# Altium PCB Sampler_4HP.PCBDOC (part 6 of 6)
Units mm, origin at the board's own origin, x right, y up, seen from the top; angles counter-clockwise.
Board outline 159.99 x 100 mm, 4 copper layers (Top, GP1(GND), L3, Bot), stack 1.648 mm thick; 546 components, 321 nets, 1657 pads, 795 vias.
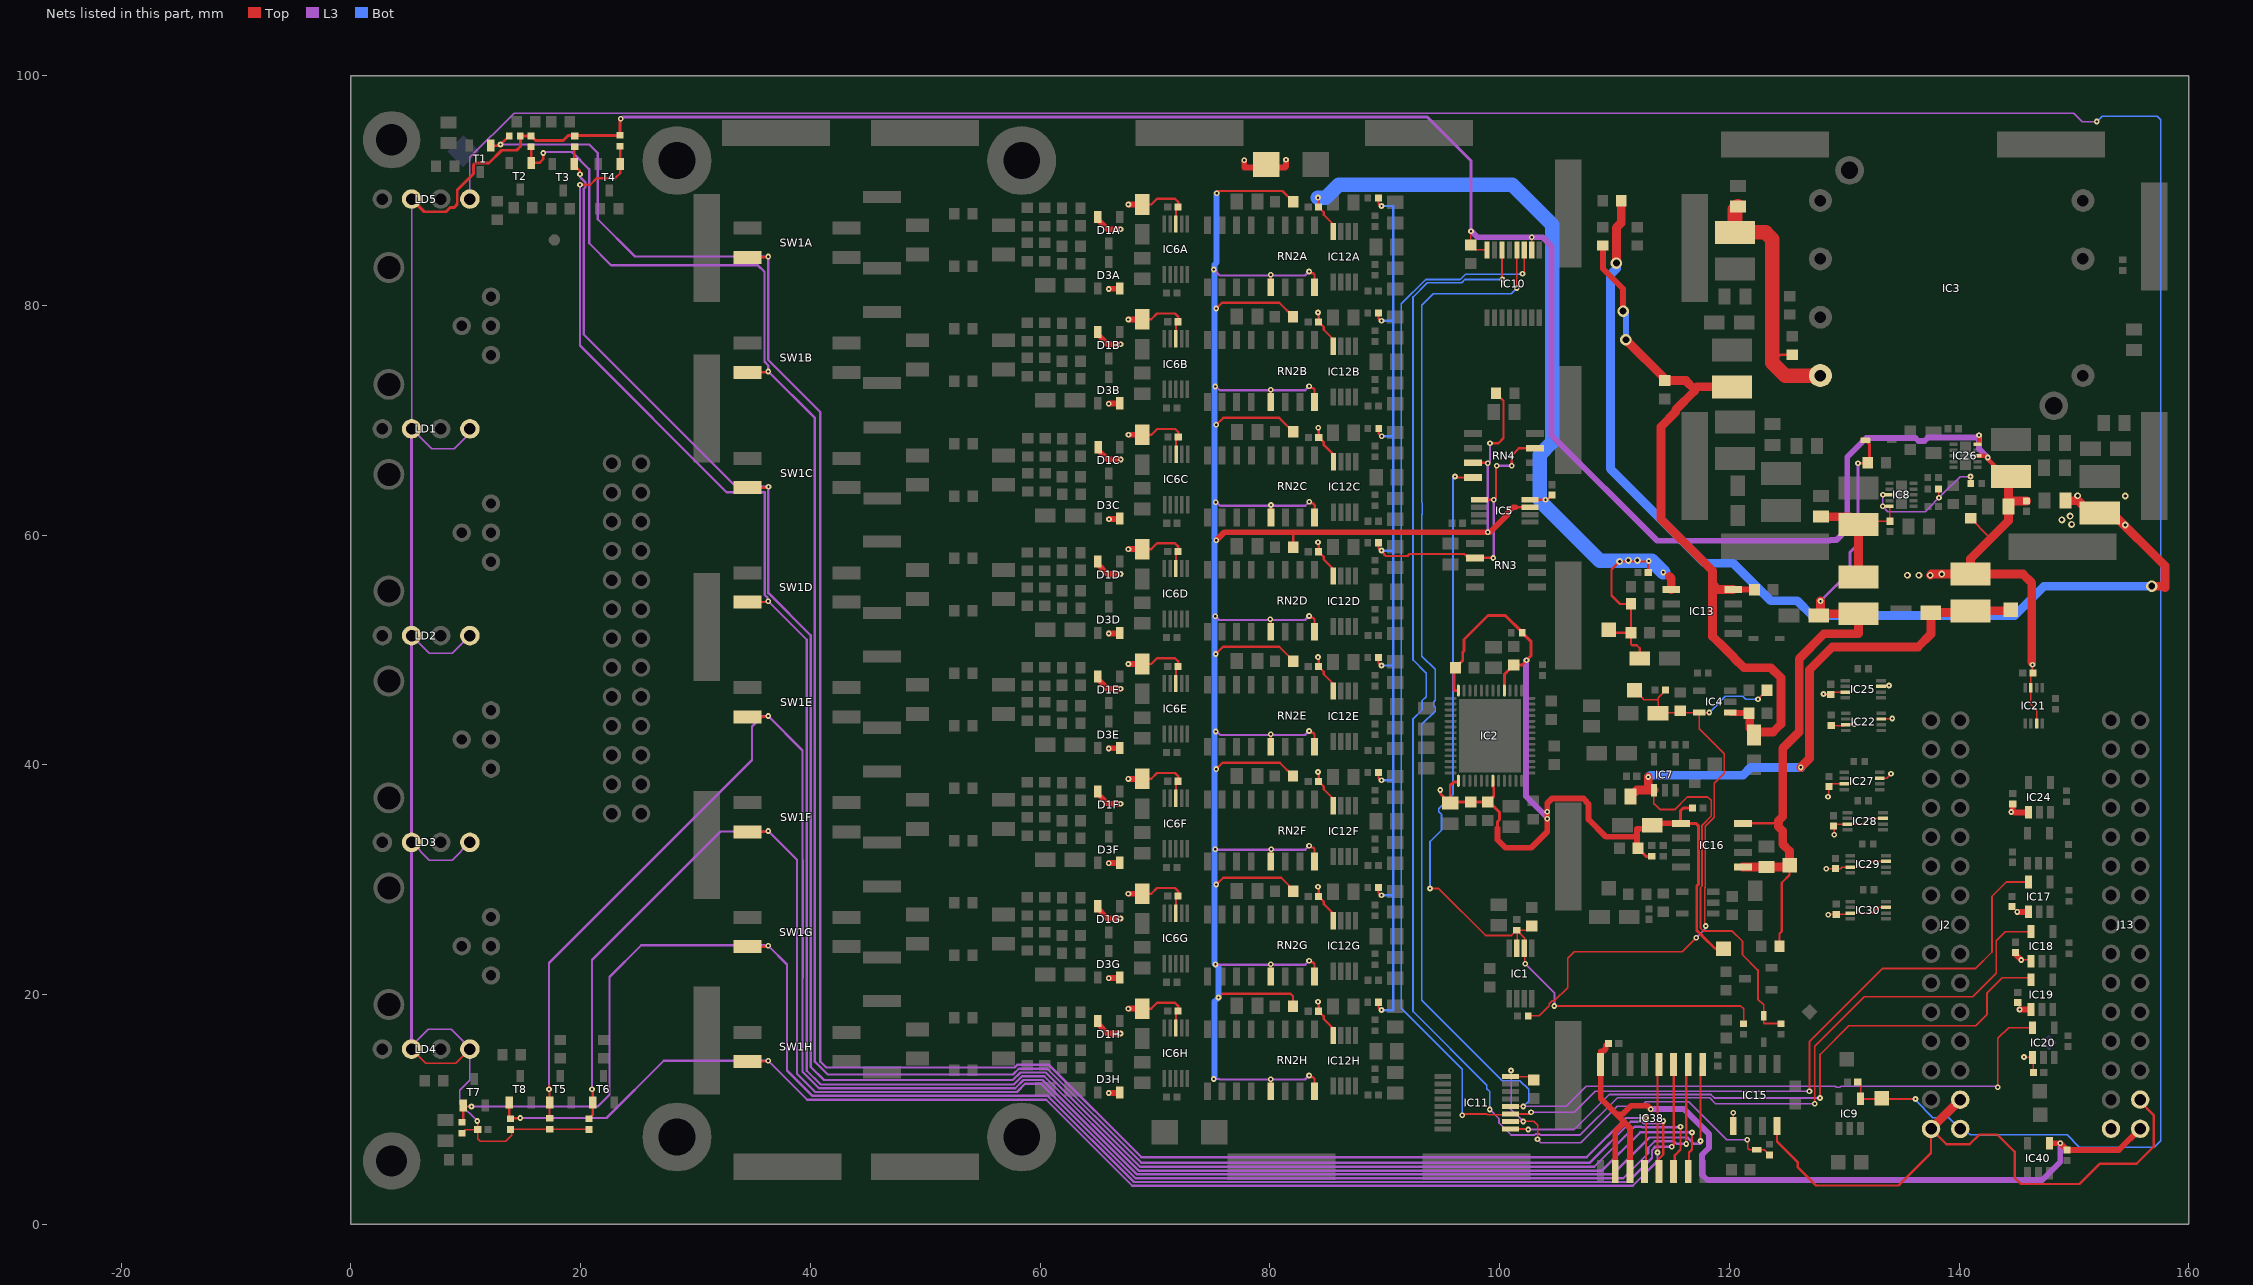
[diagram p7: the nets of this part, all layers, seen from the top]

## Via types
v1: diameter 0.5, hole 0.2, Top to Bot, tented both sides, 760 vias
v2: diameter 0.6, hole 0.3, Top to Bot, tented both sides, 15 vias
v3: diameter 1, hole 0.6, Top to Bot, tented both sides, 8 vias
v4: diameter 0.5, hole 0.2, Top to Bot, 6 vias
v5: diameter 0.6, hole 0.3, Top to Bot, 6 vias

## Nets (pads, with @x,y where several pads share a name; then routed paths per layer and width w, separated by ;. In a path a pad name is that pad's centre, name@x,y a point inside that pad or via, vN(x,y) a via of type N, cw(c..) or ccw(c..) an arc to the next point about the centre after c; other vN are vias at no path point) (continued)
P3V3: C21.2 C24.2 C31.2 C33.2 C37.2 C38.2 C57.2 C94.2 C120.2 C121.2 C154.2 C156.2 C157.2 C158.2 C159.2 C160.2 C161.2 D5.1 IC10.10 IC10.16 IC11.10 IC11.16 IC15.5 IC17.1 IC18.1 IC19.1 IC20.1 IC21.3 IC21.7 IC22.3 IC22.7 IC24.1 IC25.3 IC25.7 IC26.8 IC26.10 IC27.3 IC27.7 IC28.3 IC28.7 IC29.3 IC29.7 IC30.3 IC30.7 L1.1 L5.2 LD1.2 LD1.4 LD2.2 LD2.4 LD3.2 LD3.4 LD4.2 LD4.4 LD5.2 R5.1 R12.1 R13.1 R20.2 R49.1 R51.1 R68.1 R69.1 R70.1 R71.1 | length 423.4
  Top w0.127: LD4.2@5.29,15.25 6.54,14 9.12,14 LD4.4@10.37,15.25 ; R70.1@9.75,8.03 9.97,8.25 C37.2@11.05,8.25 ; v1(11,9) 11.05,8.95 C37.2@11.05,8.25 ; R69.1@20.75,8.28 14,8.28 14,7.75 13.5,7.25 11.25,7.25 11.05,7.45 C37.2@11.05,8.25 ; v1(97.513,86.456) C94.2@97.513,85.256 97.952,84.817 IC10.16@98.91,84.817 ; IC11.10@100.955,8.957 v1(102.057,8.957) 102.993,8.957 103.325,8.625 103.325,7.425 v1(103.3,7.4) ; v1(101,13.382) 101,12.902 IC11.16@100.955,12.857 102.693,12.857 C57.2@103,12.55 ; IC10.10@102.81,84.817 v1(102.81,85.919) ; v1(121.575,7.35) 121.615,7.31 121.615,6.635 121.75,6.5 D5.1@122.39,6.5 123.03,6.5 R51.1@123.5,6.03 ; v1(128.196,46.159) 128.244,46.111 C33.2@128.837,46.111 129.051,46.325 IC25.3@130.102,46.325 ; v1(128.436,30.961) 128.439,30.958 C21.2@129.232,30.958 129.684,30.958 129.811,31.086 IC29.3@130.536,31.086 131.964,31.086 132.468,31.59 133.632,31.59 IC29.7@133.636,31.586 ; v1(128.586,37.226) 128.677,37.316 C38.2@128.677,38.097 128.915,38.336 IC27.3@130.006,38.336 ; v1(128.611,26.936) 128.644,26.969 C31.2@129.308,26.969 130.419,26.969 IC30.3@130.536,27.086 132.486,27.086 132.986,27.586 IC30.7@133.636,27.586 ; C160.2@128.873,43.42 130.068,43.42 IC22.3@130.135,43.487 130.848,43.487 v1(130.885,43.525) ; v1(129.142,33.911) 129.142,34.61 C24.2@129.084,34.669 129.251,34.836 IC28.3@130.286,34.836 131.638,34.836 132.142,35.34 133.382,35.34 IC28.7@133.386,35.336 ; IC27.7@133.106,38.836 133.697,38.836 v1(134.086,39.226) ; IC25.7@133.202,46.825 133.818,46.825 v1(133.902,46.909) ; IC22.7@133.235,43.987 134.151,43.987 v1(134.189,44.025) ; R20.2@141,61.45 142.506,59.944 143,59.944 ; C157.2@145.114,19.293 145.275,19.453 v1(145.275,18.7) ; v1(145.421,23.009) 146.146,23.009 IC18.1@146.271,22.884 IC18.1@146.227,22.839 ; v1(145.664,14.559) 146.359,14.559 IC20.1@146.394,14.524 146.477,14.442 C156.2@146.477,13.225 ; v1(146.389,48.7) 146.389,48.062 C161.2@146.443,48.007 146.257,47.822 IC21.3@146.257,46.704 146.257,45.256 146.757,44.756 IC21.7@146.757,43.604
  Top w0.152: IC15.5@120.345,8.55 120.35,8.555 v1(120.35,9.7)
  Top w0.254: LD5.2@5.29,89.25 6.394,88.146 8.287,88.146 8.641,88.5 8.973,88.5 9.266,88.793 9.266,90.044 10.671,91.449 10.671,92.23 10.82,92.379 12.032,92.379 13.149,93.496 14.446,93.496 14.775,93.825 14.775,94.695 R5.1@14.745,94.725 ; R5.1@14.745,94.745 R12.1@15.7,94.745 16.096,94.349 18.499,94.349 18.945,94.795 R49.1@23.45,94.795 23.45,96.2 v1(23.5,96.25)
  Top w0.381: IC26.8@141.602,66.895 142.245,66.895 ; IC26.10@141.602,67.895 141.737,68.031 v1(141.737,68.695) ; v1@142.445,66.695 144.025,65.115 L5.2@144.525,65.115
  Top w0.508: v1(144.55,35.9) v1@144.675,36.025 ; C154.2@144.675,36.6 v1@144.675,36.025 ; C158.2@144.925,23.65 144.925,23.505 v1(145.421,23.009) ; v1(145.08,27.195) IC17.1@146.035,27.195 ; v1(145.275,18.7) 145.278,18.697 IC19.1@146.26,18.697 ; IC24.1@146.053,35.86 144.84,35.86 v1@144.675,36.025
  Top w0.762: v2(137.5,56.5) 137.6,56.6 v2(138.5,56.6) L1.1@141,56.6 ; L5.2@144.525,65.115 144.307,64.897 C121.2@144.307,62.498 ; C120.2@145.871,62.974 144.782,62.974 C121.2@144.307,62.498 ; 146.325,48.95 146.325,55.85 145.575,56.6 L1.1@141,56.6 ; L1.1@141,56.6 141,57.944 143,59.944 144.307,61.251 C121.2@144.307,62.498
  L3 w0.127: LD4.2@5.29,15.25 5.29,15.54 6.75,17 8.75,17 10.37,15.38 LD4.4@10.37,15.25 10.37,12.52 9.5,11.65 9.5,10.5 v1(11,9) ; LD3.2@5.29,33.25 6.834,31.706 8.826,31.706 LD3.4@10.37,33.25 ; LD2.2@5.29,51.25 6.834,49.706 8.826,49.706 LD2.4@10.37,51.25 ; LD5.2@5.29,89.25 LD1.2@5.29,69.25 7.04,67.5 9,67.5 10.37,68.87 LD1.4@10.37,69.25 ; v1(101,13.382) 101,10.104 100.955,10.059 v1(102.057,8.957) ; v1(103.3,7.4) 103.606,7.094 107.079,7.094 110.257,10.273 112.344,10.273 112.722,10.65 116.475,10.65 119.775,7.35 v1(121.575,7.35)
  L3 w0.254: LD4.2@5.29,15.54 LD3.2@5.29,33.25 LD2.2@5.29,51.25 LD1.2@5.29,69.25 ; v1(23.5,96.25) 23.643,96.393 93.707,96.393 97.513,92.587 v1(97.513,86.456)
  L3 w0.508: v1@97.528,86.472 98.081,85.919 v1(102.81,85.919) 103.756,85.919 104.525,85.15 104.525,68.7 113.725,59.5 128.758,59.5 128.814,59.556 129.306,59.556 130.275,60.525 130.275,66.8 131.92,68.445 136.22,68.445 136.476,68.189 136.999,68.189 137.311,68.501 141.545,68.501 141.737,68.309 ; v1(141.737,68.695) 141.737,68.309 ; v1(142.5,66.75) 141.737,67.512 141.737,68.309
  other v2: 135.5,56.5 136.5,56.5
P3V3_MP0: C153.2 C162.2 IC38.2 IC38.3 IC38.16 IC40.4 J13.30 | length 73
  Top w0.508: C153.2@109.45,15.75 109.241,15.541 109.241,15.282 109.018,15.059 108.805,15.059 IC38.16@108.805,13.9 108.805,10.945 110.175,9.575 ; IC38.2@110.075,4.6 110.075,8.075 110.875,8.875 ; IC38.3@111.345,4.6 111.345,8.405 110.875,8.875 ; v1(113.175,10.025) 112.875,10.325 111.45,10.325 110.7,9.575 110.175,9.575 ; IC40.4@147.864,7.059 v1(148.814,7.059) C162.2@149.414,6.459 153.914,6.459 J13.30@155.77,8.315 ; 110.175,9.575 110.875,8.875
  L3 w0.508: v1(113.175,10.025) 116.075,10.025 118.225,7.875 118.225,6.65 117.625,6.05 117.625,4.325 118.1,3.85 147.25,3.85 148.814,5.414 v1(148.814,7.059)
P3V3_MP1: C43.2 IC9.4 J2.30 LD5.4 TP5.1 | length 271.6
  Top w0.152: C43.2@131.186,12.386 131.436,12.136 IC9.4@131.436,10.936 131.456,10.916 v1(136.218,10.916)
  L3 w0.127: LD5.4@10.37,89.25 10.37,92.87 14.21,96.71 150,96.71 150.71,96 v1(152,96)
  Bot w0.127: v1(136.218,10.916) 136.218,10.794 137.715,9.296 139.116,9.296 J2.30@140.107,8.306 140.445,7.967 140.775,7.967 140.967,7.775 149.4,7.775 150.475,6.7 156.988,6.7 157.55,7.262 157.55,96.163 157.263,96.45 152.45,96.45 v1(152,96)
P3V3A: C50.1 C53.2 D2.1 IC7.1 L1.2 R23.2 TP11.1 | length 78.7
  Top w0.152: IC7.1@113.451,37.799 113.425,37.774 113.425,36.575 113.525,36.575 114,36.1 115.251,36.1 116.351,37.2 118.125,37.2 118.425,36.9 118.425,35.54 117.633,34.748 117.633,29.455 117.497,29.318 117.497,25.787 117.762,25.522 120.253,25.522 121.15,24.625 121.15,23.475 122.496,22.129 122.496,19.604 123,19.1 D2.1@123,18.14 123,17.5 123.03,17.47 R23.2@124.5,17.47
  Top w0.762: C53.2@111.4,37.25 111.949,37.799 112.925,37.799 ; v1(112.951,38.937) 112.951,37.825 112.925,37.799 ; IC7.1@113.451,37.799 112.925,37.799 ; v1(126.225,39.775) 126.975,40.525 126.975,48.25 128.975,50.25 136.425,50.25 137.55,51.375 C50.1@137.55,53.25 140.85,53.25 L1.2@141,53.4 144.4,53.4 TP11.1@144.5,53.5
  Bot w0.762: v1(112.951,38.937) 113.113,39.1 121.197,39.1 121.872,39.775 v1(126.225,39.775) v1@126.25,39.775
P5V0A: C3.2 C4.2 C5.2 C6.2 C54.2 C62.2 C114.2 C115.1 IC2.15 IC2.21 IC2.44 IC2.52 IC16.1 R10.2 R25.2 TP13.1 | length 87.8
  Top w0.254: v1(94.85,37.8) 94.85,37.485 95.658,36.677 C6.2@95.711,36.677 ; C5.2@96.021,48.45 96.021,46.529 96.09,46.46 IC2.52@96.42,46.46 ; C5.2@96.175,48.45 96.8,49.075 96.8,49.8 96.9,49.9 96.9,50.9 99,53 100.5,53 101.97,51.53 R10.2@101.97,51.5 102.754,50.716 102.754,49.504 v1(102.352,49.102) 101.95,48.7 C4.2@101.25,48.7 100.45,47.9 100.45,46.49 IC2.44@100.42,46.46 ; IC2.15@96.42,38.61 96.31,38.5 96,38.5 95.711,38.211 C6.2@95.711,36.677 ; IC2.21@99.42,38.61 99.42,38.068 99.5,37.987 99.5,37.267 C3.2@98.988,36.755 ; 99.825,34.478 99.825,35.05 100,35.225 100,35.875 99.12,36.755 C3.2@98.988,36.755 ; C114.2@112.05,32.75 112.77,32.03 R25.2@113.25,32.03 ; C62.2@116.8,36.25 116,36.25 115.75,36 115.75,34.955 IC16.1@115.8,34.905 117.095,34.905 117.303,34.697 117.303,29.592 117.167,29.455 117.167,25.583 117.296,25.454 117.334,25.454 117.629,25.159 117.629,25.121 118.75,24 TP13.1@119.5,24 TP13.1@119.715,23.785 ; C6.2@95.711,36.677 95.789,36.755 C54.2@97.489,36.755 C3.2@98.988,36.755
  Top w0.508: 99.825,34.478 99.825,33.47 100.52,32.775 102.767,32.775 104.153,34.161 v1(104.153,35.907) 104.153,36.653 104.581,37.081 107.308,37.081 107.531,36.858 107.531,36.794 107.75,36.575 107.75,35.25 109.256,33.744 111.758,33.744 111.981,33.967 ; C114.2@112.05,32.75 111.981,32.819 111.981,33.967 ; IC16.1@115.8,34.905 113.455,34.905 C115.1@113.3,34.75 112.988,34.437 111.981,34.437 111.981,33.967
  L3 w0.508: v1(102.352,49.102) 102.3,49.05 102.3,37.26 104.153,35.407 v1@104.153,35.25
  other v1: 104.163,35.299
P6V0: C58.2 C59.2 IC8.8 IC8.10 L3.2 L4.1 R24.2 R57.2 | length 28.9
  Top w0.127: L4.1@131.25,56.35 L3.2@131.25,60.9 131.55,61.2 C58.2@133.95,61.2 ; v1(133.35,62.5) IC8.10@133.95,62.5 C58.2@133.95,61.2 ; C58.2@134,61.2 C58.2@133.95,61.2 ; R24.2@138.22,64 138.22,63.28 v1(138.25,63.25) ; v1(141,65.095) 141.03,65.065 R57.2@141.03,64.5
  Top w0.762: C59.2@128,61.6 130.55,61.6 L3.2@131.25,60.9 L4.1@131.25,56.35
  L3 w0.127: v1(133.377,63.5) 133.377,62.527 v1(133.35,62.5) 133.8,62.05 137.075,62.05 138.6,63.575 138.6,63.6 140.095,65.095 v1(141,65.095)
P6V0A: C60.1 C61.2 D4.1 IC16.5 IC16.8 L4.2 R18.2 R56.2 TP12.1 | length 62.6
  Top w0.203: IC16.8@121.2,34.905 124.066,34.905 ; 124.283,34.622 124.566,34.905 124.283,34.905 ; R18.2@124.375,24.2 124.375,25.3 124.575,25.5 124.575,29.725 125.25,30.4 TP12.1@125.25,31.25
  Top w0.254: v1(131.2,66.25) 132.2,66.25 132.2,67.91 D4.1@131.86,68.25
  Top w0.762: IC16.5@121.2,31.095 125.095,31.095 TP12.1@125.25,31.25 125.25,32.5 124.661,33.089 124.661,34.244 124.283,34.622 ; 124.283,34.905 124.283,35.122 124.661,35.5 124.661,41.44 126.086,42.865 126.086,49.236 128.25,51.4 131.25,51.4 L4.2@131.25,53.15 127.95,53.15 v1(127.95,54.25)
  L3 w0.254: v1(127.95,54.25) 130.5,56.8 130.5,58.5 131.2,59.2 v1(131.2,66.25)
P12V0: C48.2 IC15.8 J2.28 J2.29 J13.28 J13.29 L6.1 R74.2 | length 144.1
  Top w0.203: IC15.8@124.155,8.55 124.155,7.195 125.975,5.375 125.975,4.95 127.55,3.375 134.733,3.375 137.567,6.208 J2.29@137.567,8.306 138.897,6.975 140.925,6.975 141.774,7.824 143.324,7.824 144.839,6.309 144.839,4.059 145.389,3.509 150.489,3.509 152.264,5.284 155.464,5.284 156.939,6.759 156.939,9.509 155.77,10.678 J13.28@155.77,10.855
  Top w0.762: v3(110.175,83.675) 110.175,86.75 110.6,87.175 R74.2@110.6,89.1 ; J2.29@137.567,8.306 J2.28@140.107,10.846 ; C48.2@149.26,62.992 150.383,62.992 151.475,61.9 153.35,61.9 157.925,57.325 157.925,55.425 157.8,55.55 v3(156.775,55.55)
  Bot w0.762: v3(110.175,83.675) 110.175,83.175 109.65,82.65 109.65,65.775 117.875,57.55 120.35,57.55 123.625,54.275 125.925,54.275 127.2,53 144.85,53 147.4,55.55 v3(156.775,55.55)
  other v2: 154.475,60.875 149.8,60.925 148.95,61.325 149.675,61.65 154.475,63.4 150.325,63.425
P12V0A: C10A.1 C10B.1 C10C.1 C10D.1 C10E.1 C10F.1 C10G.1 C10H.1 C20.2 C30.2 C35A.2 C35B.2 C35C.2 C35D.2 C35E.2 C35F.2 C35G.2 C35H.2 C51.1 C65.2 C70A.2 C70B.2 C70C.2 C70D.2 C70E.2 C70F.2 C70G.2 C70H.2 D1A.2 D1B.2 D1C.2 D1D.2 D1E.2 D1F.2 D1G.2 D1H.2 D3A.2 D3B.2 D3C.2 D3D.2 D3E.2 D3F.2 D3G.2 D3H.2 D8.1 IC5.8 IC6A.8 IC6B.8 IC6C.8 IC6D.8 IC6E.8 IC6F.8 IC6G.8 IC6H.8 IC12A.8 IC12B.8 IC12C.8 IC12D.8 IC12E.8 IC12F.8 IC12G.8 IC12H.8 IC13.1 R142.2 TP7.1 | length 193.6
  Top w0.203: C10H.1@68.885,18.778 69.685,18.778 70.188,19.281 71.755,19.281 72.021,19.015 C35H.2@72.021,18.568 71.831,18.378 IC6H.8@71.831,17.087 ; C10G.1@68.885,28.778 69.685,28.778 70.188,29.281 71.755,29.281 72.021,29.015 C35G.2@72.021,28.568 71.831,28.378 IC6G.8@71.831,27.087 ; C10F.1@68.885,38.778 69.685,38.778 70.188,39.281 71.755,39.281 72.021,39.015 C35F.2@72.021,38.568 71.831,38.378 IC6F.8@71.831,37.087 ; C10E.1@68.885,48.778 69.685,48.778 70.188,49.281 71.755,49.281 72.021,49.015 C35E.2@72.021,48.568 71.831,48.378 IC6E.8@71.831,47.087 ; C10D.1@68.885,58.778 69.685,58.778 70.188,59.281 71.755,59.281 72.021,59.015 C35D.2@72.021,58.568 71.831,58.378 IC6D.8@71.831,57.087 ; C10B.1@68.885,78.778 69.685,78.778 70.188,79.281 71.755,79.281 72.021,79.015 C35B.2@72.021,78.568 71.831,78.378 IC6B.8@71.831,77.087 ; C10A.1@68.885,88.778 69.685,88.778 70.188,89.281 71.755,89.281 72.021,89.015 C35A.2@72.021,88.568 71.831,88.378 IC6A.8@71.831,87.087 ; C10C.1@68.897,68.734 69.697,68.734 70.201,69.237 71.768,69.237 72.034,68.971 C35C.2@72.034,68.524 71.844,68.334 IC6C.8@71.844,67.043 ; v1(84.2,19.375) 84.25,19.325 C70H.2@84.25,18.55 84.7,18.1 84.7,17.875 85.525,17.05 IC12H.8@85.525,16.429 ; v1(84.2,29.375) 84.25,29.325 C70G.2@84.25,28.55 84.7,28.1 84.7,27.875 85.525,27.05 IC12G.8@85.525,26.429 ; v1(84.2,39.375) 84.25,39.325 C70F.2@84.25,38.55 84.7,38.1 84.7,37.875 85.525,37.05 IC12F.8@85.525,36.429 ; v1(84.2,49.375) 84.25,49.325 C70E.2@84.25,48.55 84.7,48.1 84.7,47.875 85.525,47.05 IC12E.8@85.525,46.429 ; v1(84.2,59.375) 84.25,59.325 C70D.2@84.25,58.55 84.7,58.1 84.7,57.875 85.525,57.05 IC12D.8@85.525,56.429 ; v1(84.2,79.375) 84.25,79.325 C70B.2@84.25,78.55 84.7,78.1 84.7,77.875 85.525,77.05 IC12B.8@85.525,76.429 ; v1(84.2,89.375) 84.25,89.325 C70A.2@84.25,88.55 84.7,88.1 84.7,87.875 85.525,87.05 IC12A.8@85.525,86.429 ; v1(84.213,69.331) 84.263,69.281 C70C.2@84.263,68.506 84.713,68.056 84.713,67.831 85.538,67.006 IC12C.8@85.538,66.385 ; IC5.8@102.65,63.075 v1(104,63.075) 104.175,63.075 C20.2@104.575,63.475 ; TP7.1@109.5,51.75 109.75,51.5 C65.2@111.45,51.5 ; C51.1@112.2,49.25 112.2,50.15 111.95,50.4 111.55,50.4 111.45,50.5 C65.2@111.45,51.5 ; C30.2@112.95,56.75 112.95,57.7 v2(110.45,57.7) 109.75,57 109.75,54.75 110.5,54 R142.2@111.45,54 C65.2@111.45,51.5 ; v1(114.25,56.75) 114.687,56.312
  Top w0.508: D1H.2@65.039,17.688 65.039,17.458 65.883,16.614 v1(67.013,16.614) ; D1G.2@65.039,27.688 65.039,27.458 65.883,26.614 v1(67.013,26.614) ; D1F.2@65.039,37.688 65.039,37.458 65.883,36.614 v1(67.013,36.614) ; D1E.2@65.039,47.688 65.039,47.458 65.883,46.614 v1(67.013,46.614) ; D1D.2@65.039,57.688 65.039,57.458 65.883,56.614 v1(67.013,56.614) ; D1B.2@65.039,77.688 65.039,77.458 65.883,76.614 v1(67.013,76.614) ; D1A.2@65.039,87.688 65.039,87.458 65.883,86.614 v1(67.013,86.614) ; D1C.2@65.052,67.644 65.052,67.414 65.895,66.57 v1(67.026,66.57) ; v1(65.984,11.424) 66.002,11.442 D3H.2@66.894,11.442 ; v1(65.984,21.424) 66.002,21.442 D3G.2@66.894,21.442 ; v1(65.984,31.424) 66.002,31.442 D3F.2@66.894,31.442 ; v1(65.984,41.424) 66.002,41.442 D3E.2@66.894,41.442 ; v1(65.984,51.424) 66.002,51.442 D3D.2@66.894,51.442 ; v1(65.984,71.424) 66.002,71.442 D3B.2@66.894,71.442 ; v1(65.984,81.424) 66.002,81.442 D3A.2@66.894,81.442 ; v1(65.996,61.38) 66.015,61.398 D3C.2@66.906,61.398 ; v1(67.691,18.773) 67.696,18.778 C10H.1@68.885,18.778 ; v1(67.691,28.773) 67.696,28.778 C10G.1@68.885,28.778 ; v1(67.691,38.773) 67.696,38.778 C10F.1@68.885,38.778 ; v1(67.691,48.773) 67.696,48.778 C10E.1@68.885,48.778 ; v1(67.691,58.773) 67.696,58.778 C10D.1@68.885,58.778 ; v1(67.691,78.773) 67.696,78.778 C10B.1@68.885,78.778 ; v1(67.691,88.773) 67.696,88.778 C10A.1@68.885,88.778 ; v1(67.704,68.729) 67.708,68.734 C10C.1@68.897,68.734 ; v1(77.776,92.618) 77.776,92 81.332,92 81.408,92.076 v1(81.408,92.669)
  Top w0.762: 114.775,56.4 114.949,56.226 IC13.1@114.949,55.254
  Bot w1.27: v1(84.2,89.375) 84.875,89.375 86,90.5 101.1,90.5 104.6,87 104.6,68.1 103.5,67 103.5,63.075 ; 103.713,62.787 108.738,57.762 112.988,57.762 v1(113,57.75) 113.25,57.75 v1(114.25,56.75)
  other v2: 111.225,57.8 112,57.8
P13V0: C29.2 C77.1 C112.2 C117.2 IC4.1 IC13.8 L11.2 R3.2 | length 65.9
  Top w0.508: R3.2@109,85.2 109,83.193 110.75,81.443 v3(110.75,79.5) ; IC4.1@120.1,44.55 120.15,44.5 C117.2@121.7,44.5 ; IC13.8@120.349,55.254 122.196,55.254 C112.2@122.2,55.25
  Top w0.762: v3(111,77) C29.2@114.463,73.538 ; C29.2@114.375,73.45 116.225,73.45 116.225,73.425 116.975,72.675 116.975,72.543 115.342,70.91 115.342,70.72 114.05,69.428 114.05,61.375 118.55,56.875 118.55,55.725 ; 117.2,72.9 L11.2@120.25,72.9 ; IC13.8@120.349,55.254 119.021,55.254 118.55,55.725 ; C117.2@121.7,44.5 121.775,44.425 121.775,43.2 122.125,42.85 123.8,42.85 124.5,43.55 124.5,47.575 123.625,48.45 121.275,48.45 120.439,49.286 120.439,49.315 119.182,50.572 119.153,50.572 118.55,51.175 118.55,55.725
  Bot w0.508: v3(110.75,79.5) 111,79.25 v3(111,77)
P13V0S: C26.2 IC3.7 L10.1 R7.2 | length 23.3
  Top w0.203: 123.75,75 124.45,75.7 R7.2@125.5,75.7
  Top w1.27: C26.2@120.75,88.6 120.5,88.35 L10.1@120.5,86.35 123.15,86.35 123.75,85.75 123.75,75 124.87,73.88 IC3.7@127.93,73.88
PGIA-CS: IC10.12 IC11.12 IC20.5 | length 138.8
  Top w0.127: IC11.12@100.955,10.257 v1(102.057,10.257) ; v1(101.5,81.5) 101.51,81.51 IC10.12@101.51,84.817 ; v1(143.375,11.925) 143.375,16.175 144.324,17.124 IC20.5@146.394,17.124
  L3 w0.127: v1(102.057,10.257) 105.806,10.257 107.566,12.016 129.233,12.016 129.304,11.945 129.669,11.945 129.724,12 143.3,12 v1(143.375,11.925)
  Bot w0.127: v1(101.5,81.5) 101,81 94.25,81 93.25,80 93.25,62.812 93.253,62.809 93.253,61.791 93.25,61.788 93.25,49.439 94.385,48.304 94.385,45.606 94.286,45.507 94.286,45.125 94.385,45.027 94.385,44.68 93.25,43.545 93.25,19.5 100.25,12.5 101.775,12.5 102.525,11.75 102.525,10.725 v1(102.057,10.257)
PGIA-MISO: IC11.9 IC19.5 | length 54.4
  Top w0.152: IC11.9@100.955,8.307 102.443,8.307 v1(102.5,8.25) ; v1(127.906,11.001) 127.906,14.781 130.4,17.275 141.45,17.275 142.425,18.25 142.425,20.125 143.766,21.466 146.091,21.466 IC19.5@146.26,21.297
  L3 w0.152: v1(102.5,8.25) 106.5,8.25 109.546,11.296 118.401,11.296 118.697,11 v1(127.906,11.001)
PGIA-MOSI: IC10.14 IC18.5 | length 146.1
  Top w0.127: v1(127.45,10.5) 127.45,15.5 131.75,19.8 141.2,19.8 143.25,21.85 143.25,24.7 144.034,25.484 IC18.5@146.271,25.484
  Top w0.152: IC10.14@100.21,84.817 100.21,82.29 v1(100.25,82.25)
  L3 w0.152: v1(99.141,10) 99.953,9.188 99.953,8.828 101,7.782 103.041,7.782 103.112,7.853 103.488,7.853 103.559,7.782 107.032,7.782 110.267,11.017 118.285,11.017 118.802,10.5 v1(127.45,10.5)
  Bot w0.152: v1(99.141,10) 99.141,11.559 98.892,11.808 98.892,12.108 92.475,18.525 92.475,44 93.25,44.775 93.25,45.566 93.61,45.927 93.61,47.983 92.475,49.118 92.475,62.109 92.478,62.112 92.478,62.488 92.475,62.491 92.475,80.725 93.721,81.971 96.696,81.971 96.975,82.25 v1(100.25,82.25)
PGIA-SCK: IC10.11 IC11.11 IC17.5 | length 149.7
  Top w0.152: v1(96.75,9.5) 96.857,9.607 98.893,9.607 98.953,9.547 100.895,9.547 IC11.11@100.955,9.607 102.607,9.607 v1(102.75,9.75) ; v1(102,82.75) 102.16,82.91 IC10.11@102.16,84.817 ; v1(126.975,11.575) 126.975,15.9 133.35,22.275 141.45,22.275 142.875,23.7 142.875,28.55 144.12,29.795 IC17.5@146.035,29.795
  L3 w0.152: v1(102.75,9.75) 106.5,9.75 108.325,11.575 v1(126.975,11.575)
  Bot w0.152: v1(96.75,9.5) 96.75,13.5 91.447,18.803 91.447,80.126 93.571,82.25 96.58,82.25 97.033,82.703 101.953,82.703 v1(102,82.75)
REF_P1V7066: IC5.7 R72.2 R73A.1 R73B.1 R73C.1 R73D.1 R73E.1 R73F.1 R73G.1 R73H.1 RN2A.5 RN2A.8 RN2B.5 RN2B.8 RN2C.5 RN2C.8 RN2D.5 RN2D.8 RN2E.5 RN2E.8 RN2F.5 RN2F.8 RN2G.5 RN2G.8 RN2H.5 RN2H.8 RN4.7 | length 263.8
  Top w0.203: v1(75.3,49.65) 75.925,50.275 80.825,50.275 82.05,49.05 R73E.1@82.05,49 ; v1(75.346,29.575) 75.946,30.175 81,30.175 82.05,29.125 R73G.1@82.05,29 ; v1(75.346,39.625) 75.896,40.175 80.875,40.175 R73F.1@82.025,39.025 ; v1(75.346,69.6) 75.946,70.2 80.825,70.2 R73C.1@82.05,68.975 ; v1(75.346,79.725) 75.846,80.225 80.825,80.225 R73B.1@82.025,79.025 ; v1(75.375,89.75) 75.579,89.954 81.096,89.954 R73A.1@82.05,89 ; v1(75.529,19.751) 75.576,19.751 75.9,20.075 81.8,20.075 82.025,19.85 R73H.1@82.025,19 ; v1(80.05,52.675) 80.08,52.645 RN2D.5@80.08,51.575 ; v1(80.075,42.65) 80.08,42.645 RN2E.5@80.08,41.575 ; v1(80.075,72.65) 80.08,72.645 RN2B.5@80.08,71.575 ; v1(80.075,82.65) 80.08,82.645 RN2A.5@80.08,81.575 ; RN2H.5@80.08,11.575 v1(80.08,12.62) ; RN2G.5@80.08,21.575 v1(80.08,22.63) ; RN2F.5@80.08,31.575 80.08,32.605 v1(80.125,32.65) ; RN2C.5@80.093,61.532 80.093,62.618 v1(80.1,62.625) ; R73D.1@82.05,58.925 82.05,60.174 82.125,60.249 ; v1(83.425,12.95) 83.575,12.8 83.75,12.8 83.89,12.66 RN2H.8@83.89,11.575 ; v1(83.425,22.95) 83.575,22.8 83.75,22.8 83.89,22.66 RN2G.8@83.89,21.575 ; v1(83.425,32.95) 83.575,32.8 83.75,32.8 83.89,32.66 RN2F.8@83.89,31.575 ; v1(83.425,42.95) 83.575,42.8 83.75,42.8 83.89,42.66 RN2E.8@83.89,41.575 ; v1(83.425,52.95) 83.575,52.8 83.75,52.8 83.89,52.66 RN2D.8@83.89,51.575 ; v1(83.425,72.95) 83.575,72.8 83.75,72.8 83.89,72.66 RN2B.8@83.89,71.575 ; v1(83.425,82.95) 83.575,82.8 83.75,82.8 83.89,82.66 RN2A.8@83.89,81.575 ; v1(83.438,62.906) 83.588,62.756 83.763,62.756 83.903,62.616 RN2C.8@83.903,61.532 ; RN4.7@97.7,66.29 98.935,66.29 v1(98.975,66.25) ; v1(99.175,68) 99.9,68 100.35,68.45 100.35,71.7 R72.2@99.7,72.35 ; 101.398,62.425 IC5.7@102.65,62.425
  Top w0.508: v1(75.346,59.55) 76.045,60.249 82.125,60.249 99.174,60.249 100.694,61.769 100.694,61.936 101.183,62.425 101.398,62.425
  L3 w0.203: v1(75.125,12.65) 75.6,12.65 75.65,12.6 83.075,12.6 v1(83.425,12.95) ; v1(75.125,83.125) 75.65,82.6 83.075,82.6 v1(83.425,82.95) ; v1(75.25,32.65) 75.3,32.6 83.075,32.6 v1(83.425,32.95) ; v1(75.254,52.928) 75.581,52.6 83.075,52.6 v1(83.425,52.95) ; v1(75.279,22.626) 75.305,22.6 83.075,22.6 v1(83.425,22.95) ; v1@75.288,72.962 75.65,72.6 83.075,72.6 v1(83.425,72.95) ; v1@75.335,62.884 75.663,62.556 83.088,62.556 v1(83.438,62.906) ; v1@75.349,42.947 75.696,42.6 83.075,42.6 v1(83.425,42.95) ; v1(98.975,60.25) v1(98.975,66.25) 99.175,66.45 v1(99.175,68)
  Bot w0.508: v1(75.125,12.65) 75.194,12.719 75.194,19.386 75.529,19.721 v1(75.529,19.751) 75.529,22.376 v1(75.279,22.626) 75.194,22.711 75.194,29.423 v1(75.346,29.575) 75.194,29.727 75.194,49.65 75.194,59.398 v1(75.346,59.55) 75.194,59.702 75.194,69.6 75.194,83.536 75.375,83.717 v1(75.375,89.75)
  other v1: 75.304,42.902 75.304,62.853 75.254,72.929
REF_P2V048: IC5.1 R50A.1 R50B.1 R50C.1 R50D.1 R50E.1 R50F.1 R50G.1 R50H.1 RN3.6 RN4.3 | length 108.4
  Top w0.203: R50H.1@89.47,19.325 89.47,18.855 89.7,18.625 v1(89.725,18.65) ; R50G.1@89.47,29.325 89.47,28.855 89.7,28.625 v1(89.725,28.65) ; R50F.1@89.47,39.325 89.47,38.855 89.7,38.625 v1(89.725,38.65) ; R50E.1@89.47,49.325 89.47,48.855 89.7,48.625 v1(89.725,48.65) ; R50D.1@89.47,59.325 89.47,58.855 89.956,58.369 89.956,58.307 90.09,58.173 91.998,58.173 92.175,58.35 96.925,58.35 97.265,58.01 RN3.6@97.875,58.01 99.44,58.01 v1(99.45,58) ; R50B.1@89.47,79.325 89.47,78.855 89.7,78.625 v1(89.725,78.65) ; R50A.1@89.47,89.325 89.47,88.855 89.7,88.625 v1(89.725,88.65) ; R50C.1@89.483,69.281 89.483,68.811 89.713,68.581 v1(89.738,68.606) ; IC5.1@98.25,63.075 v1(99.5,63.075) 99.7,63.275 99.7,65.975 v1(99.75,66.025) ; v1(101.075,66.025) 101.075,66.95 101.685,67.56 RN4.3@103.1,67.56
  L3 w0.203: v1(99.45,58) 99.5,58.05 v1(99.5,63.075) ; v1(99.75,66.025) v1(101.075,66.025)
  Bot w0.203: v1@89.789,18.646 90.75,18.646 90.75,28.646 ; v1@89.789,28.646 90.75,28.646 ; v1@89.789,38.646 90.75,38.646 ; v1@89.789,48.646 90.75,48.646 ; v1@89.789,58.646 90.75,58.646 ; v1@89.789,78.646 90.75,78.646 ; v1@89.789,88.646 90.75,88.646 90.75,78.646 ; v1@89.802,68.602 90.75,68.602 ; 90.75,28.646 90.75,38.646 ; 90.75,38.646 90.75,48.646 ; 90.75,48.646 90.75,58.646 ; 90.75,58.646 90.75,68.602 ; 90.75,68.602 90.75,78.646
  other v1: 89.725,58.65
REF_P4V096: C2.2 IC1.6 IC1.7 R1.1 R22.1 RN4.8 | length 76.4
  Top w0.152: v1(93.95,29.225) 94.7,29.225 98.777,25.148 101.044,25.148 101.484,25.588 R1.1@101.504,25.588 ; v1(96.125,65.1) 96.205,65.02 RN4.8@97.7,65.02 ; IC1.7@101.538,24.087 R1.1@101.538,25.555 ; v1(102.25,22.675) 102.188,22.737 102.188,24.905 R1.1@101.538,25.555 ; C2.2@102.8,25.969 102.419,25.588 R1.1@101.504,25.588 ; v1(104.775,19) 121,19 121.25,18.75 121.25,17.8 ; R1.1@101.504,25.588 R1.1@101.538,25.555
  L3 w0.152: v1(102.25,22.675) 104.775,20.15 v1(104.775,19)
  Bot w0.152: v1(93.95,29.225) 93.95,33.316 94.953,34.319 94.953,35.688 94.711,35.929 94.711,36.186 95.95,37.425 95.95,49.809 95.953,49.812 95.953,50.188 95.95,50.191 95.95,64.925 v1(96.125,65.1)
REF_VCC: C45.2 C116.2 C118.1 IC4.5 R15.1 R26.2 TP8.1 | length 55.9
  Top w0.127: R15.1@102.508,18.133 103.458,18.133 104.335,19.009 104.335,19.182 104.593,19.44 104.766,19.44 105.925,20.6 105.925,23.15 106.508,23.733 115.908,23.733 v1(117.125,24.95) ; TP8.1@111.75,46.5 112.5,45.75 112.5,45.662 113.788,45.662 113.8,45.65 ; C45.2@114.45,46.5 113.8,45.85 113.8,45.65 ; v1(117.95,25.975) 117.859,26.066 117.859,29.304 117.9,29.344 117.9,34.638 118.692,35.43 118.692,38.402 119.576,39.286 119.576,40.949 117.4,43.125 IC4.5@117.4,44.55 ; v1(118.25,44.55) IC4.5@117.4,44.55 ; v1(122.5,45.7) C116.2@123.3,46.5 ; 113.8,45.65 C118.1@113.8,44.5 113.85,44.55 IC4.5@117.4,44.55
  L3 w0.127: v1(117.125,24.95) 117.95,25.775 v1(117.95,25.975)
  Bot w0.127: v1(118.25,44.55) 119.666,45.965 121.157,45.965 121.423,45.7 v1(122.5,45.7)
TERM_STAT0: IC38.4 R5.2 SW1A.2 T1.1 | length 188.1
  Top w0.203: T1.1@12.2,93.9 12.93,93.9 v1(13.03,94) R5.2@13.78,94.75 ; SW1A.2@34.542,84.17 36.272,84.17 v1(36.342,84.24) ; IC38.4@112.615,4.6 112.75,4.735 v1(112.75,9.25)
  L3 w0.203: v1(13.03,94) 20.75,94 21.5,93.25 21.5,87.5 24.75,84.25 36.332,84.25 v1(36.342,84.24) 36.342,75.233 40.875,70.7 40.875,14.163 41.347,13.691 41.359,13.691 41.4,13.65 57.788,13.65 58.018,13.88 60.773,13.88 68.823,5.83 107.58,5.83 111,9.25 v1(112.75,9.25)
TERM_STAT1: IC38.5 R12.2 SW1B.2 T2.1 | length 187
  Top w0.203: R12.2@15.75,93.78 15.7,93.73 T2.1@15.7,92.4 16.425,92.4 16.75,92.725 v1(16.75,93.25) ; SW1B.2@34.542,74.17 36.272,74.17 v1(36.342,74.24) ; IC38.5@113.885,4.6 113.885,5.708 114.25,6.073 v1(114.25,9)
  L3 w0.203: v1(16.75,93.25) 16.84,93.34 19.25,93.34 20.759,91.831 20.759,90.165 20.75,90.156 20.75,85.407 22.682,83.475 35.45,83.475 36.012,82.913 36.012,75.096 36.342,74.766 v1(36.342,74.24) 40.4,70.182 40.4,14.15 41.512,13.038 57.643,13.038 58.155,13.549 60.636,13.549 68.817,5.368 107.868,5.368 111.42,8.92 112.403,8.92 112.552,8.771 114.021,8.771 v1(114.25,9)
TERM_STAT2: IC38.6 R13.2 SW1C.2 T3.1 | length 177.7
  Top w0.203: R13.2@19.5,93.78 19.45,93.73 T3.1@19.45,92.3 19.45,92.2 19.95,91.7 v1(19.95,91.4) ; SW1C.2@34.555,64.126 36.285,64.126 v1(36.355,64.196) ; IC38.6@115.155,4.6 115.25,4.695 115.25,6 115.75,6.5 v1(115.75,8.5)
  L3 w0.203: v1(19.95,91.4) 19.95,91.177 20.429,90.698 20.429,90.302 20.28,90.153 20.28,77.47 33.554,64.196 v1(36.355,64.196) 36.355,54.945 40.03,51.27 40.03,13.72 41.194,12.556 57.628,12.556 58.291,13.219 60.5,13.219 68.715,5.004 108.254,5.004 111.75,8.5 112.356,8.5 112.415,8.441 115.691,8.441 v1(115.75,8.5)
TERM_STAT3: IC38.7 R49.2 SW1D.2 T4.1 | length 181.6
  Top w0.203: v1(19.95,90.5) 20.85,90.5 21.425,91.075 23.025,91.075 23.45,91.5 T4.1@23.45,92.3 23.45,93.73 R49.2@23.5,93.78 ; SW1D.2@34.542,54.17 36.272,54.17 v1(36.342,54.24) ; IC38.7@116.425,4.6 116.5,4.675 116.5,6.25 116.75,6.5 v1(116.75,8)
  L3 w0.203: v1(19.95,90.5) 19.95,76.5 32.733,63.717 36.024,63.717 36.024,54.809 36.272,54.561 36.272,54.17 v1(36.342,54.24) 39.7,50.882 39.7,13.375 40.904,12.171 57.71,12.171 58.428,12.889 60.363,12.889 68.578,4.674 108.924,4.674 112.25,8 v1(116.75,8)
TERM_STAT4: IC38.9 R68.2 SW1E.2 T5.1 | length 168.6
  Top w0.203: R68.2@17.25,9.22 17.3,9.27 T5.1@17.3,10.6 17.3,12 17.25,12.05 ; SW1E.2@34.542,44.17 36.272,44.17 v1(36.342,44.24) ; v1(117.5,7.25) 117.5,13.705 IC38.9@117.695,13.9
  L3 w0.203: v1(17.25,11.75) 17.25,22.75 34.925,40.425 34.925,43.325 35.84,44.24 v1(36.342,44.24) 39.325,41.257 39.325,31.724 39.33,31.719 39.33,21.445 39.325,21.44 39.325,13.275 40.759,11.841 57.847,11.841 58.565,12.559 60.226,12.559 68.441,4.343 109.843,4.343 113.059,7.559 116.368,7.559 116.927,7 117.5,7 v1(117.5,7.25)
TERM_STAT5: IC38.10 R69.2 SW1F.2 T6.1 | length 148.4
  Top w0.203: R69.2@20.75,9.22 21.05,9.52 T6.1@21.05,10.6 21.05,11.7 v1(21,11.75) ; SW1F.2@34.542,34.17 36.272,34.17 v1(36.342,34.24) ; v1(116.25,7) 116.25,13.725 IC38.10@116.425,13.9
  L3 w0.203: v1(21,11.75) 21,23 32.19,34.19 36.292,34.19 v1(36.342,34.24) 38.842,31.74 38.842,13.108 40.44,11.51 57.984,11.51 58.702,12.229 60.089,12.229 68.305,4.013 110.763,4.013 112.941,6.191 112.941,6.658 113.512,7.229 115.198,7.229 115.427,7 v1(116.25,7)
TERM_STAT6: IC38.11 R70.2 SW1G.2 T7.1 | length 143.1
  Top w0.203: R70.2@9.75,8.97 9.8,9.02 T7.1@9.8,10.35 9.9,10.25 v1(10.5,10.25) ; SW1G.2@34.542,24.17 36.272,24.17 v1(36.342,24.24) ; v1(115,6.75) 115.155,6.905 IC38.11@115.155,13.9
  L3 w0.203: v1(10.5,10.25) 21.5,10.25 22.521,11.271 22.521,21.521 25.29,24.29 36.292,24.29 v1(36.342,24.24) 37.975,22.607 37.975,13.4 40.195,11.18 60.671,11.18 68.168,3.683 111.183,3.683 113.271,5.771 113.271,6.448 113.5,6.677 113.5,6.75 v1(115,6.75)
TERM_STAT7: IC38.12 R71.2 SW1H.2 T8.1 | length 119
  Top w0.203: T8.1@13.8,10.6 13.8,9.42 14,9.22 14.72,9.22 v1(14.75,9.25) ; SW1H.2@34.542,14.17 36.272,14.17 v1(36.342,14.24) ; v1(113.75,6.25) 113.75,13.765 IC38.12@113.885,13.9
  L3 w0.203: v1(14.75,9.25) 22.25,9.25 27.24,14.24 v1(36.342,14.24) 39.733,10.849 60.535,10.849 68.031,3.353 111.603,3.353 113.75,5.5 v1(113.75,6.25)
pads on no net: FTG17.FTG2 FTG18.1 FTG19.1 FTG20.1 IC3.8 IC3.9 IC8.4 IC9.5 IC26.4 IC38.13 IC40.5 J3.6 J3.7 J4.6 J4.7 J5.6 J5.7 J6.6 J6.7

## Polygon pours and split planes (outlines as drawn)
N12V0A on Top "ML1_BAL" (solid, remove dead copper, pour order 18): 116.836,27.875 116.836,25.686 116.025,24.875 115.95,24.8 110,24.8 110,28.05 110.025,28.075 110.075,28.125 116.6,28.125
NetC32_2 on Top "Top Overlay-No Net" (solid, remove dead copper, pour order 2): 158.013,74.956 158.013,66.456 152.263,66.456 152.013,66.706 150.419,68.3 150.419,69.583 150.419,70.862 150.419,74.956
P12V0 on Top "ML1_BAL" (solid, remove dead copper, pour order 16): 159,5 159,64 148,64 148,59 154,59 154,48 155,47 156,46 156,41 156,13 155,12 152,9 152,5
P12V0A on Top "ML1_BAL" (solid, remove dead copper, pour order 20): 116.175,54.75 116.175,56.35 114.9,57.625 114.05,58.475 109.8,58.475 109.325,58.475 108.6,57.75 108.425,57.575 108.425,52.6 108.425,51.475 109.1,50.8 110.15,49.75 110.15,48.875 110.15,48.65 110.825,47.975 112.95,47.975 113.125,47.975 113.525,48.375 113.55,48.4 113.55,49.85 113.55,54.225 113.95,54.625 114.025,54.7 116.125,54.7
GND on Bot "ML1_BAL" (solid, remove dead copper, pour order 24): 0.33,99.3 159.45,99.3 159.45,0.7 0.624,0.7
N12V0A on Bot "ML1_BAL" (solid, remove dead copper, pour order 4): 63.518,89.518 63.518,9.482 66.25,6.75 72.5,6.75 89.5,6.75 89.5,10 72.8,10 66.426,10 65.5,10.926 65.5,19.25 65.5,89.5 65.25,89.75 63.75,89.75
N12V0A on Bot "ML1_BAL" (solid, remove dead copper, pour order 10): 88,82.5 88.365,82.5 89.5,81.365 89.5,10 88.5,9 87.5,9 87,9.5 86.825,9.675 86.825,13.208 86.825,82.325 87,82.5
P12V0A on Bot "ML1_BAL" (solid, remove dead copper, pour order 6): 67.5,10.25 66.5,10.25 66,10.75 65.75,11 65.75,12.326 65.75,90 66.5,90.75 69.5,93.75 81,93.75 85.1,93.75 86.25,92.6 86.25,89.75 86.25,16.25 85.75,15.75 85.25,15.75 84.859,15.75 82.75,17.859 82.75,89 82.5,89.25 82.25,89.5 75.25,89.5 73.75,89.5 73.25,89 72.978,88.728 69.5,88.728 69.478,88.728 69,88.25 69,11.75 67.5,10.25 66.75,10.25
GND on L3 "ML1_BAL" (solid, remove dead copper, pour order 22): 0.289,99.525 160.325,99.525 160.325,65.725 159.45,64.85 159.325,64.975 146.35,64.975 145.225,63.85 145.225,59.375 103.8,59.375 101.55,57.125 98.925,54.5 98.925,0.475 1.475,0.475 0.663,1.287
P12V0 on L3 "ML1_BAL" (solid, remove dead copper, pour order 14): 136,8 136,9.728 139.272,13 145,13 155,13 156,14 156,18 156,58.55 154.55,60 149,60 148,60 147,61 147,63 148,64 154.3,64 159,64 159,3 136,3
P3V3 on L3 "ML1_BAL" (solid, remove dead copper, pour order 12): 100,18 100,6 103,3 125,3 134,3 135,4 135.636,4.636 135.636,9 135.636,9.636 138,12 139,13 144,13 155,13 156,14 156,58 134,58 105,58 100,53
GND on GP1(GND) (split plane): 159.484,0.51 0.51,0.51 0.51,99.489 113.763,99.489 113.763,84.956 114.013,84.706 114.013,67.706 126.513,55.206 139.4,55.206 139.4,56.206 127.263,56.206 114.763,68.706 114.763,86.32 114.763,99.489 159.484,99.489

## Keep-outs
Top:
  lines w0.1: 6.075,3.05 6.075,4.5 6.275,4.7 6.275,5.025 ; 6.075,8.125 6.075,6.825 6.275,6.625 6.275,6.1
L3:
  lines w0.1: 6.075,3.025 6.075,4.5 6.275,4.7 6.275,6.668 6.075,6.868 6.075,8.103 ; 6.325,91.525 6.325,96.975
Bot:
  lines w0.1: 6.075,3.05 6.075,4.425 6.35,4.7 6.35,6.475 6.075,6.75 6.075,8.1 ; 6.325,93.1 6.325,95.85
KeepOutLayer:
  lines w0.1: 6.325,91.5 6.325,93.8 ; 6.325,94.95 6.325,97.003
  lines w0.203: 6.096,3.023 159,3.023 159,97.003 6.325,97.003 ; 6.096,8.103 5.799,8.4 4.687,8.65 2.613,8.65 1.651,8.4 1.651,91.5 6.325,91.5

## Other copper
Top:
  region net NetB1_1: 7.66,92.122 7.66,94.525 7.157,94.525 7.157,92.122
  rectangle net NetB1_1: 5.336,94.14 8.45,94.643
  rectangle net NetB2_1: 4.35,5.259 8.525,5.9
  rectangle net GND: 112.45,27.45 113,27.75
  rectangle net GND: 123.025,43.776 123.475,44.4
  rectangle net GND: 110.55,38.8 111.1,39.225
  rectangle net GND: 19.2,95.775 19.75,96.225
  rectangle net GND: 85.075,91.75 85.475,92.225
  rectangle net GND: 125.625,66.775 126.086,67.2
  rectangle net P6V0: 133.5,62.35 133.636,62.643
  rectangle net P6V0: 133.525,63.35 133.675,63.65
  rectangle net NetC32_2: 138.55,67.45 138.834,67.966
  rectangle net GND: 147.2,62.042 147.625,62.475
  rectangle net GND: 142.275,61.548 142.725,62.038
  rectangle net GND: 146.675,4.809 147.15,5.259
  rectangle net NetIC2_43: 100.475,51.25 100.825,51.75
  rectangle net GND: 99.25,50.65 99.675,51.041
  rectangle net P3V3: 135,56 139.75,57
  rectangle net ADC_IN_P0: 42.125,87.8 50.325,90.725
  rectangle net ADC_IN_P1: 42.125,77.84 50.325,80.765
  rectangle net ADC_IN_P2: 42.138,67.756 50.338,70.681
  rectangle net ADC_IN_P3: 42.125,57.8 50.325,60.725
  rectangle net ADC_IN_P4: 42.125,47.8 50.325,50.725
  rectangle net ADC_IN_P5: 42.125,37.8 50.325,40.725
  rectangle net ADC_IN_P6: 42.125,27.8 50.325,30.725
  rectangle net ADC_IN_P7: 42.125,17.8 50.325,20.725
  rectangle net GND: 112.675,71.6 113.675,72.075
  rectangle net GND: 114.975,82.025 117,85.2
  rectangle net P5V0A: 103.825,34.9 104.575,36.275
  pour cut-out: 114.763,86.32 114.763,68.706 127.263,56.206 138.225,56.206 138.225,55.206 126.513,55.206 114.013,67.706 114.013,84.706 113.763,84.956 113.763,101.206 114.763,101.206
L3:
  rectangle net GND: 96.569,39.45 101.65,45.739
  rectangle net P5V0A: 103.65,35.075 104.4,36.175
  pour cut-out: 114.763,86.32 114.763,68.706 127.263,56.206 138.25,56.206 138.25,55.206 126.513,55.206 114.013,67.706 114.013,84.706 113.763,84.956 113.763,101.206 114.763,101.206
Bot:
  rectangle net N12V0A: 112.725,25.425 116.3,26.975
  pour cut-out: 114.763,86.32 114.763,68.706 127.263,56.206 138,56.206 138,55.206 126.513,55.206 114.013,67.706 114.013,84.706 113.763,84.956 113.763,101.206 114.763,101.206
GP1(GND) (plane layer: these items are gaps in the copper):
  pour cut-out: 114.763,86.32 114.763,68.706 127.263,56.206 139.4,56.206 139.4,55.206 126.513,55.206 114.013,67.706 114.013,84.706 113.763,84.956 113.763,101.206 114.763,101.206

## Silkscreen, mask and mechanical layers (free items; w line width, h text height)
TopOverlay:
  drawing of 1239 lines, arcs and shapes, not listed
  text "Sampler v2.2" at 102.075,96.85 h2.03
  text "WUT ISE 2018" at 104.8,95.2 h1.02
  text "CH0" at 36.925,89.375 h1.02
  text "on" at 43.013,80.017 h1.02
  text "off" at 33.513,79.767 h1.02
  text "CH1" at 37.675,79.375 h1.02
  text "Bot ADC0" at 16.75,74.5 h1.02 r90
  text "Up ADC1" at 18.25,74.5 h1.02 r90
  text "ADC IN" at 21.25,71.75 h1.02
  text "on" at 42.763,69.956 h1.02
  text "off" at 33.263,69.706 h1.02
  text "CH2" at 37.675,69.375 h1.02
  text "Termination" at 48.225,60.275 h1.02
  text "on" at 43.013,60.206 h1.02
  text "off" at 33.513,59.956 h1.02
  text "CH3" at 37.425,59.375 h1.02
  text "+12V" at 154.25,58.75 h1.02
  text "Bot ADC2" at 16.75,55.75 h1.02 r90
  text "Up ADC3" at 18.25,55.75 h1.02 r90
  text "P3V3A" at 145.75,53.25 h1.02
  text "+12V" at 109.75,53 h1 r90
  text "on" at 42.763,50.206 h1.02
  text "off" at 33.263,49.956 h1.02
  text "EEM 1" at 135.825,49.45 h1.52
  text "EEM 0" at 150.9,49.425 h1.52
  text "CH4" at 37.425,49.375 h1.02
  text "REF / VCC" at 107.675,46 h1
  text "on" at 41.763,40.206 h1.02
  text "off" at 33.75,40 h1.02
  text "CH5" at 37.425,39.375 h1.02
  text "Bot ADC4" at 16.75,38.5 h1.02 r90
  text "Up ADC5" at 18.25,38.5 h1.02 r90
  text "P2V5" at 118.25,37.75 h1
  text "N12VA" at 107.975,30.825 h1.02
  text "on" at 43.013,30.206 h1.02
  text "Termination" at 48.45,30.15 h1.02
  text "off" at 33.513,29.956 h1.02
  text "CH6" at 37.425,29.375 h1.02
  text "P6V0A" at 125.675,25.275 h1 r90
  text "P5V0A" at 113.475,23.425 h1
  text "Bot ADC6" at 16.75,20.25 h1.02 r90
  text "Up ADC7" at 18.25,20.25 h1.02 r90
  text "on" at 43.013,20.206 h1.02
  text "off" at 33.513,19.956 h1.02
  text "CH7" at 37.675,19.375 h1.02
  text "GND" at 127.886,15.736 h1
  text "P3V3 / MP1" at 134.525,12.136 h1 r90
  text "SDA" at 149.85,11.275 h1 r90
  text "I2C0" at 145.075,9.85 h1 r90
  text "SCL" at 149.75,8.1 h1 r90
  text "I2C1" at 133.836,4.511 h1 r90
  text "SCL" at 127.861,2.886 h1
  text "SDA" at 131.111,2.836 h1
BottomOverlay:
  drawing of 1237 lines, arcs and shapes, not listed
  text "Sampler v2.2" at 129,7 h2.03
  text "WUT ISE 2018" at 122.013,3.023 h1.02
BottomSolder:
  rectangle: 96.675,39.475 101.675,45.6
Mechanical1:
  drawing of 299 lines, arcs and shapes, not listed
  text "Layer" at 8.894,137.706 h1.52
  text "Name" at 19.305,137.706 h1.52
  text "Material" at 41.397,137.706 h1.52
  text "Thickness" at 63.235,137.706 h1.52
  text "Constant" at 79.741,137.706 h1.52
  text "Board Layer Stack" at 94.216,137.706 h1.52
  text "TopOverlay" at 19.305,134.658 h1.52
  text "TopSolder" at 19.305,131.61 h1.52
  text "Solder Resist" at 41.397,131.61 h1.52
  text "0,40mil" at 63.235,131.61 h1.52
  text "3.5" at 79.741,131.61 h1.52
  text "1" at 8.894,128.562 h1.52
  text "Top" at 19.305,128.562 h1.52
  text "2,28mil" at 63.235,128.562 h1.52
  text "Dielectric1" at 19.305,125.514 h1.52
  text "FR-4" at 41.397,125.514 h1.52
  text "7,09mil" at 63.235,125.514 h1.52
  text "4.8" at 79.741,125.514 h1.52
  text "2" at 8.894,122.466 h1.52
  text "GP1(GND)" at 19.305,122.466 h1.52
  text "1,42mil" at 63.235,122.466 h1.52
  text "Dielectric 3" at 19.305,119.418 h1.52
  text "43,31mil" at 63.235,119.418 h1.52
  text "4.2" at 79.741,119.418 h1.52
  text "3" at 8.894,116.37 h1.52
  text "L3" at 19.305,116.37 h1.52
  text "1,42mil" at 63.235,116.37 h1.52
  text "Dielectric2" at 19.305,113.322 h1.52
  text "FR-4" at 41.397,113.322 h1.52
  text "7,09mil" at 63.235,113.322 h1.52
  text "4.2" at 79.741,113.322 h1.52
  text "4" at 8.894,110.274 h1.52
  text "Bot" at 19.305,110.274 h1.52
  text "2,28mil" at 63.235,110.274 h1.52
  text "BottomSolder" at 19.305,107.226 h1.52
  text "Solder Resist" at 41.397,107.226 h1.52
  text "0,40mil" at 63.235,107.226 h1.52
  text "3.5" at 79.741,107.226 h1.52
  text "BottomOverlay" at 19.305,104.178 h1.52
Mechanical4:
  lines w1: 31,5 31,95 106,95 106,5 31,5 ; 117,59 117,94 157,94 157,59 117,59
DrillDrawing:
  rectangle: 115.1,65.5 117,66.175

## Text inside footprints (layer, text, board x,y; h text height)
J1: TopOverlay "26" at 21.333,65.605 h1.02 r90; Mechanical14 "26" at 21.333,65.605 h1.02 r90
J2: TopOverlay "30" at 141.504,8.941 h1.02 r270; Mechanical14 "30" at 141.504,8.941 h1.02 r270
J13: TopOverlay "30" at 157.167,8.95 h1.02 r270; Mechanical14 "30" at 157.167,8.95 h1.02 r270